# Altium PCB WallBaseBoard.PcbDoc
Units mil, origin at the board's own origin, x right, y up, seen from the top; angles counter-clockwise.
Board outline 1771.65 x 1771.65 mil, 2 copper layers (Top Layer, Bottom Layer); 40 components, 33 nets, 151 pads, 16 vias.
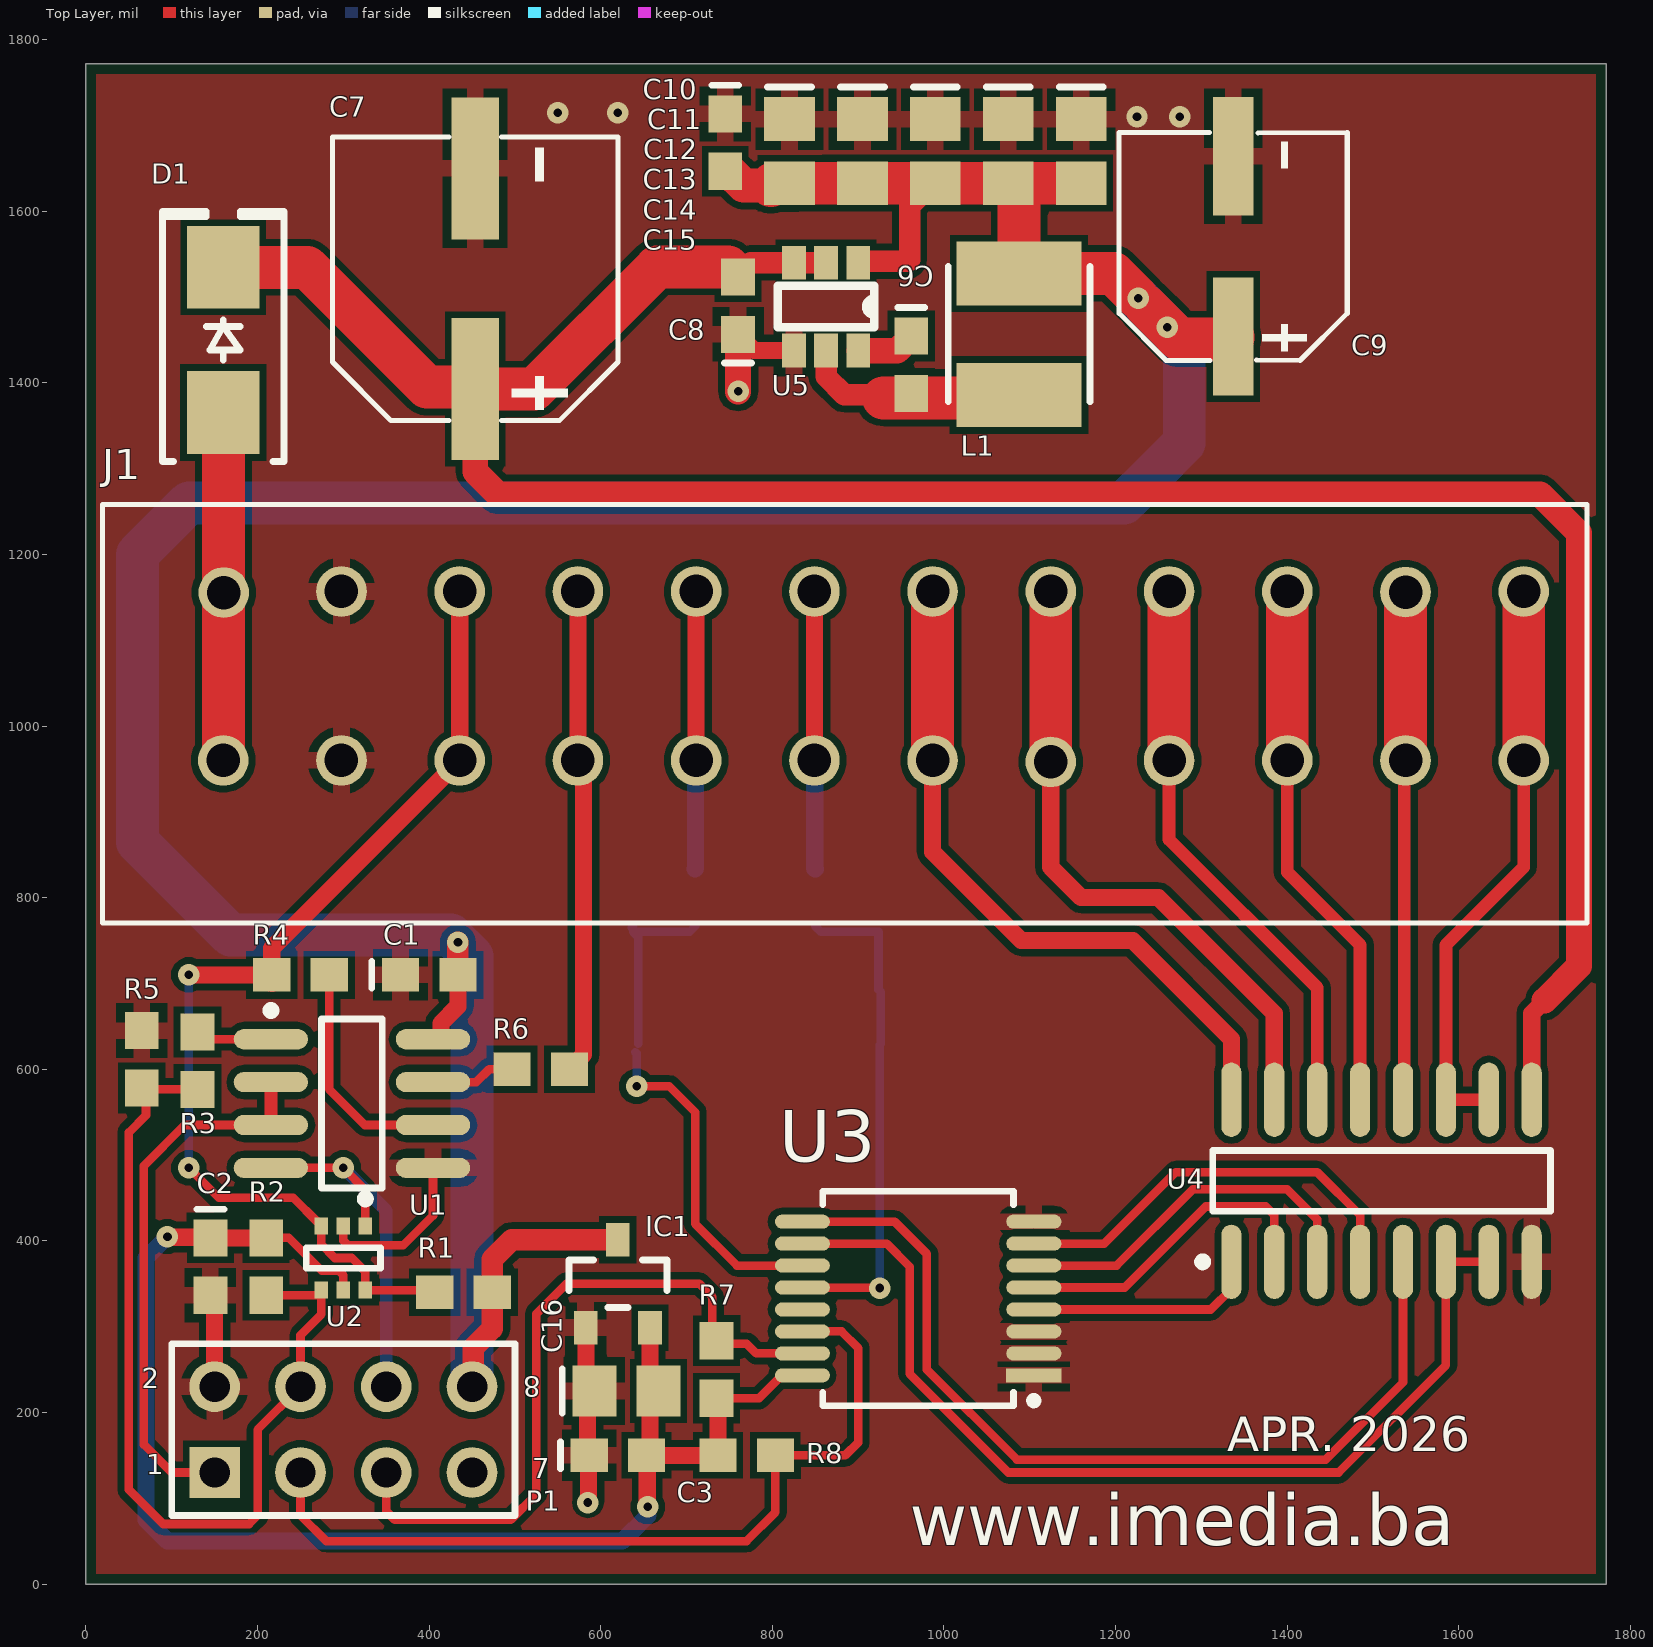
[diagram p0: Top Layer view]
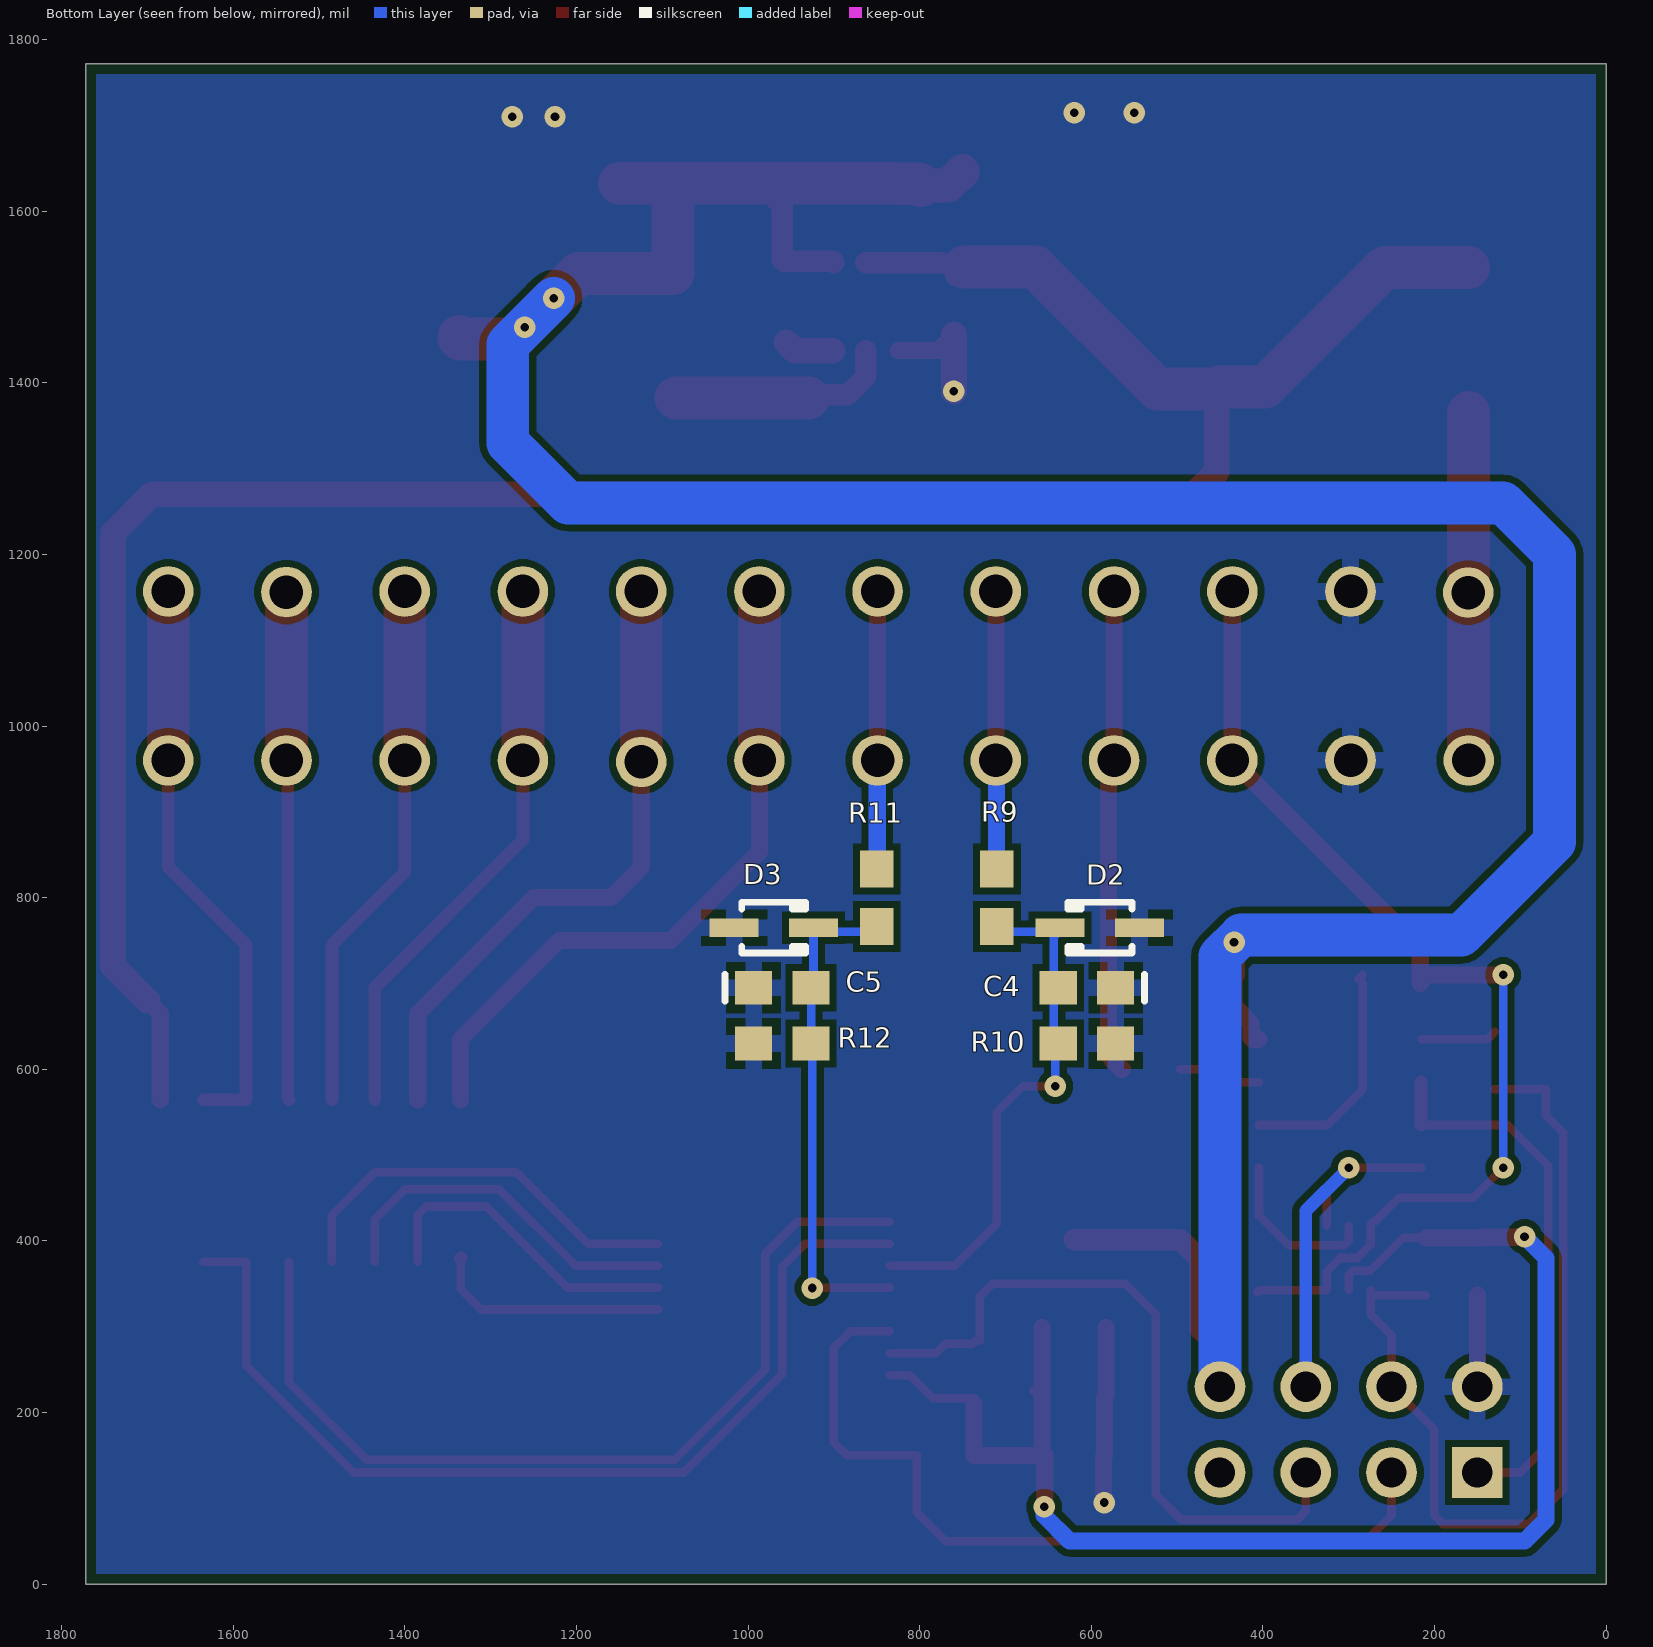
[diagram p1: Bottom Layer view, seen from below]

## Layer stack, top to bottom
Top Solder: solder mask 0.4, Solder Resist, Dk 3.5
Top Layer: signal copper 1.4
Dielectric 1: dielectric 12.6, FR-4, Dk 4.8
Bottom Layer: signal copper 1.4
Bottom Solder: solder mask 0.4, Solder Resist, Dk 3.5

## Board outline
0,0 0,1771.65 1771.65,1771.65 1771.65,0

## Design rules (kind name [scope] priority, off if disabled: settings)
BoardOutlineClearance [All] p1: gap=11.81 ignorepadtopadclearanceinfootprint=FALSE except(15.75: Arc-SplitBarrior Arc-SplitContinuation Track-SplitBarrior Track-SplitContinuation SMDPad-SplitBarrior SMDPad-SplitContinuation THPad-SplitBarrior THPad-SplitContinuation Via-SplitBarrior Via-SplitContinuation Fill-SplitBarrior Fill-SplitContinuation Poly-SplitBarrior Poly-SplitContinuation Region-SplitBarrior Region-SplitContinuation Text-SplitBarrior Text-SplitContinuation)
Clearance "Clearance Different Nets" [All] p1: gap=7.87 ignorepadtopadclearanceinfootprint=FALSE except(5: Arc-Arc Arc-Track Arc-SMDPad Track-Track Track-SMDPad SMDPad-SMDPad SMDPad-Via THPad-Via Via-Via; 10: Arc-Via Arc-Text Track-Via Track-Text SMDPad-Text THPad-Text Via-Text Fill-Text Poly-Text Region-Text Text-Text; 19.68: THPad-THPad Via-Hole)
Clearance "Clearance Same Nets" [All] p2: gap=7.87 ignorepadtopadclearanceinfootprint=FALSE except(5: Arc-Arc Arc-Track Arc-SMDPad Track-Track Track-SMDPad SMDPad-SMDPad SMDPad-Via THPad-Via; 10: Arc-Via Arc-Text Track-Via Track-Text SMDPad-Text THPad-Text Via-Via Via-Text Fill-Text Poly-Text Region-Text Text-Text)
Clearance "Clearance Bottom Layer" [OnLayer('Bottom Layer')] p3: gap=8 ignorepadtopadclearanceinfootprint=TRUE except(10: Arc-Text Track-Text SMDPad-Text THPad-Text Via-Text Fill-Text Poly-Text Region-Text Text-Text)
Clearance "Clearance Top Layer" [OnLayer('Top Layer')] p4: gap=8 ignorepadtopadclearanceinfootprint=TRUE except(10: Arc-Text Track-Text SMDPad-Text THPad-Text Via-Text Fill-Text Poly-Text Region-Text Text-Text)
HoleSize [All] p1: absolutevalues=TRUE maxlimit=248.03 minlimit=7.87 maxpercent=80.000 minpercent=20.000
MinimumAnnularRing [All] p1: minimumring=5.12
MinimumSolderMaskSliver [All] p1: minsoldermaskwidth=3.94
PolygonConnect PolygonConnect_1 [All] p1: thpad.connectstyle=Relief thpad.reliefconductorwidth=20 thpad.reliefentries=4 thpad.polygonreliefangle="90 Angle" thpad.airgapwidth=10 smdpad.connectstyle=Relief smdpad.reliefconductorwidth=20 smdpad.reliefentries=4 smdpad.polygonreliefangle="90 Angle" smdpad.airgapwidth=10 via.connectstyle=Direct via.reliefconductorwidth=20 via.reliefentries=4 via.polygonreliefangle="90 Angle" via.airgapwidth=10
RoutingCorners [All] p1: cornerstyle=Round minsetback=100 maxsetback=100
RoutingVias [All] p1: holewidth=19.68 width=39.37 viastyle="Through Hole" minholewidth=7.87 minwidth=13.78 maxholewidth=39.37 maxwidth=78.74
SilkToSilkClearance [All] p1: silktosilkclearance=3.94
SilkToSolderMaskClearance [IsPad] p1: minsilkscreentomaskgap=3.94 clearancetoexposedcopper=TRUE
SolderMaskExpansion [All] p1: expansion=5 istentingtop=FALSE
SupplyNets "Schematic Supply Nets_3" [InNet('VIN')] p1: voltage=0.000
SupplyNets "Schematic Supply Nets_2" [InNet('3V3')] p2: voltage=0.000
SupplyNets "Schematic Supply Nets_1" [InNet('GND')] p3: voltage=0.000
SupplyNets "Schematic Supply Nets" [InNet('5V')] p4: voltage=0.000
Width [All] p1: maxlimit=100 minlimit=5 preferedwidth=15
25 further rules are at their usual default settings.

## Components (designator, comment, footprint, x,y, rotation, side; value= is the part's Value field where it differs from the comment)
C1 "100nF" 0603 400,710 r0 top
C2 "100nF" 0603 145,370 r270 top
C3 "100nF" 0603 620,150 r0 top
C4 "100nF" 0603 605,695 r0 bottom
C5 "100nF" 0603 960,695 r180 bottom
C6 "100nF" 0603 961.99,1420.95 r270 top
C7 "220uF" SMD,D8xL10.2mm 460,1530 r90 top
C8 "100nF" 0603 760,1490 r90 top
C9 "ROQANG VT1C221M0607_1" "SMD,D6.3xL7.7mm Aluminum Electrolytic Capacitors" 1340,1570 r90 top value=220uF
C10 "100nF" 0603 745,1680 r270 top
C11 "4u7" 0805 820,1670 r270 top value=10uF
C12 "4u7" 0805 905,1670 r270 top value=10uF
C13 "4u7" 0805 990,1670 r270 top value=10uF
C14 "4u7" 0805 1075,1670 r270 top value=10uF
C15 "4u7" 0805 1160,1670 r270 top value=10uF
C16 "4u7" 0805 630,225 r0 top value=10uF
D1 "RS1DB-13-F" "DO214AA SMB" 160,1450 r90 top
D2 "3V3" SOD323 590,765 r0 bottom
D3 "3V3" SOD323 970,765 r180 bottom
IC1 "AP2138N-2.5TRG1" "DIODES SOT-23-3 N" 620,350 r90 top
J1 "1985292" CONN_1985292_PXC 160,960 r0 top
L1 "Inductor" XRNR4030-4.7uH/M 1090,1460 r270 top value=4,7uH
P1 "ESP32_S3" HDR2X4 150,130 r0 top
R1 "NF" ERA-0603 440,340 r0 top value=4K7
R2 "NF" ERA-0603 210,370 r90 top value=4K7
R3 "10K" ERA-0603 130,610 r90 top value=1K2
R4 "10K" ERA-0603 250,710 r180 top value=0R
R5 "10K" ERA-0603 65,611.54 r270 top value=2K2
R6 "10K" ERA-0603 530,600 r0 top value=0R
R7 "10K" ERA-0603 735,250 r270 top value=2K2
R8 "10K" ERA-0603 770,150 r180 top value=2K2
R9 "10K" ERA-0603 710,800 r270 bottom value=4K7
R10 "10K" ERA-0603 605,630 r0 bottom
R11 "10K" ERA-0603 850,800 r270 bottom value=4K7
R12 "10K" ERA-0603 960,630 r180 bottom
U1 "THVD1500DR" NSO8_N 310,560 r0 top
U2 "NC7WZ07P6X" FP-419AD-01-MFG 300,380 r270 top
U3 "PCA9554DBR" SSOP-16 1104.68,243.23 r180 top
U4 "ULN2003D" SO16_N 1510,470 r90 top
U5 "AP63205WU-7" TSOT-26 900,1540 r270 top

## Footprints (in the part's own frame and the unit in brackets; to place one, negate y for a bottom-side part, rotate by r counter-clockwise, add the part's x,y. Pads: shape width x height; smd on the part's side, far side on the other; paste and mask are expansions set on the pad)
0603 [mm]
  rect 1.1x1 smd: 1(-0.85,0) 2(0.85,0)
  silkscreen extent -1.7,-0.4 -1.7,0.4
0805 [mm]
  rect 1.3x1.5 smd: 1(-0.95,0) 2(0.95,0)
  silkscreen extent -1.9,-0.65 -1.9,0.65
CONN_1985292_PXC [mil]
  round 59 hole 39 paste-99999 mask+0: 1(0,0) 1(0.64,195.52) 2(137.8,0) 2(137.8,196.85) 3(275.59,0) 3(275.59,196.85) 4(413.39,0) 4(413.39,196.85) 5(551.18,196.85) 5(551.18,0) 6(688.98,0) 6(688.98,196.85) 7(826.77,196.85) 7(826.77,0) 8(964.43,-1.77) 8(964.57,196.85) 9(1102.36,196.85) 9(1102.36,0) 10(1240.16,0) 10(1240.16,196.85) 11(1377.95,0) 11(1377.96,196.09) 12(1515.75,0) 12(1515.75,196.85)
  silkscreen extent -141,-190 1589,298
"DIODES SOT-23-3 N" [mm] "SOT23, 3-Leads, Body 2.90x2.40mm, Pitch 0.95mm, IPC Medium Density"
  rect 1x0.7 smd: 1(-1.3,0.95) 2(-1.3,-0.95) 3(1.3,0)
  silkscreen extent -0.7,-1.45 0.7,1.45, body extent -1.5,-1.55 1.5,1.55, height 1.45
"DO214AA SMB" [mm] "Molded Diode, 2-Leads, Body 4.31x3.62mm, IPC Medium Density"
  rect 2.45x2.15 smd: 1(-2.15,0) 2(2.15,0)
  silkscreen extent -3.6,-1.8 3.8,1.8, body extent -2.6,-1.8 2.6,1.8, height 2.4
ERA-0603 [mm]
  rect 1.1x1 smd: 1(-0.85,0) 2(0.85,0)
FP-419AD-01-MFG [mm]
  rect 0.5x0.4 smd paste+0 mask+0: 1(-0.95,0.65) 2(-0.95,0) 3(-0.95,-0.65) 4(0.95,-0.65) 5(0.95,0) 6(0.95,0.65)
  silkscreen extent -1.87,-1.1 0.3,1.1, body extent -1.3,-1.2 1.3,1.2, height 0.25
HDR2X4 [mm] "Connector; Header; 4x2 Position"
  rect 1.5x1.5 hole 0.9: 1(0,0)
  round 1.5 hole 0.9: 2(0,2.54) 3(2.54,0) 4(2.54,2.54) 5(5.08,0) 6(5.08,2.54) 7(7.62,0) 8(7.62,2.54)
  silkscreen extent -1.27,-1.27 8.89,3.81
NSO8_N [mm] "SOIC, 8-Leads, Body 4.9x3.9mm, Pitch 1.27mm, IPC Medium Density"
  oval 2.2x0.6 smd: 1(-2.4,1.905) 2(-2.4,0.635) 3(-2.4,-0.635) 4(-2.4,-1.905) 5(2.4,-1.905) 6(2.4,-0.635) 7(2.4,0.635) 8(2.4,1.905)
  silkscreen extent -2.52,-2.5 0.9,2.88, body extent -2,-2.5 2,2.5, height 1.75
"SMD,D6.3xL7.7mm Aluminum Electrolytic Capacitors" [mm]
  rect 3.5x1.2 smd paste+0 mask+0.051: 1(-2.949,0.074) 2(2.391,0.074)
  silkscreen extent -3.66,-3.3 3.1,3.45, body extent -3.4,-3.15 2.9,3.15, height 7.7
SMD,D8xL10.2mm [mm]
  rect 4.2x1.4 smd paste+0 mask+0.051: 1(-3.488,0.162) 2(3.046,0.162)
  silkscreen extent -4.42,-4.06 3.98,4.39, body extent -4.25,-3.82 3.75,4.18, height 10.2
SO16_N [mm] "SOIC, 16-Leads, Body 9.9x3.9mm, Pitch 1.27mm, IPC Medium Density"
  oval 2.2x0.6 smd: 1(-2.4,4.445) 2(-2.4,3.175) 3(-2.4,1.905) 4(-2.4,0.635) 5(-2.4,-0.635) 6(-2.4,-1.905) 7(-2.4,-3.175) 8(-2.4,-4.445) 9(2.4,-4.445) 10(2.4,-3.175) 11(2.4,-1.905) 12(2.4,-0.635) 13(2.4,0.635) 14(2.4,1.905) 15(2.4,3.175) 16(2.4,4.445)
  silkscreen extent -2.52,-5 0.9,5.42, body extent -1.95,-4.95 1.95,4.95, height 1.75
SOD323 [mm] "SOD-323/SC-76; 2 Leads; Body 1.7 x 1.3 mm, (LxW)"
  rect 1.45x0.55 smd: 1(1.175,0) 2(-1.175,0)
  silkscreen extent -0.95,-0.75 0.95,0.75
SSOP-16 [mm] "SSOP, 16-Leads, Body 6.2x5.3mm, Pitch 0.65mm"
  rect 1.63x0.42 smd: 1(0,0)
  oval 1.63x0.42 smd: 2(0,-0.65) 3(0,-1.3) 4(0,-1.95) 5(0,-2.6) 6(0,-3.25) 7(0,-3.9) 8(0,-4.55) 9(6.85,-4.55) 10(6.85,-3.9) 11(6.85,-3.25) 12(6.85,-2.6) 13(6.85,-1.95) 14(6.85,-1.3) 15(6.85,-0.65) 16(6.85,0)
  silkscreen extent -0.1,-5.45 6.25,0.9, body extent -0.48,-5.38 7.32,0.83, height 1.9
TSOT-26 [mm]
  rect 1x0.7 smd: 1(0,0) 2(0,-0.95) 3(0,-1.9) 4(2.6,-1.9) 5(2.6,-0.95) 6(2.6,0)
  silkscreen extent 0.69,-2.38 1.91,0.48, body extent 0.53,-2.51 2.03,0.61, height 1
XRNR4030-4.7uH/M [mm]
  rect 1.9x3.7 smd paste+0 mask+0.051: 1(-1.717,-0.059) 2(1.883,-0.059)
  silkscreen extent -1.92,-2.16 2.08,2.04

## Part data
C1 C2 C3 C4 C5 C6 C8 C10: library part C0603, "Ceramic Chip Capacitor - Standard", PackageDocument=Mar-2001, Code_IPC="1608 [0603]", Code_JEITA=0603, ComponentLink1Description="Manufacturer Link", ComponentLink1URL=http://www.kemet.com/, ComponentLink2Description=Datasheet, ComponentLink2URL=http://www.kemet.com/kemet/web/homepage/kechome.nsf/vapubfilesname/F3102TA.pdf/$file/F3102TA.pdf, DatasheetDocument=Mar-2001, LatestRevisionDate=19-Mar-2004, LatestRevisionNote="Silkscreen size reduced.", Note="Footprint corresponds to dimensions for bulk cassette packaging. This case size has tightened tolerances.", PackageReference=0603, Published=17-Jul-2002, Publisher="Altium Limited"
C7: library part "ROQANG VT1V221M0810", "220uF 35V 195mA@120Hz ±20% SMD,D8xL10.2mm Aluminum Electrolytic Capacitors - SMD ROHS", ComponentLink1Description="Manufacturer Link", ComponentLink1URL=http://www.vishay.com/, ComponentLink2Description=Datasheet, ComponentLink2URL=http://www.vishay.com/docs/25014/eka.pdf, DatasheetDocument=20-Feb-2001, DrillSize="Nominal, Rounded To The Nearest 0.1mm", Note="Refer to Manufacturer's Data Sheets for other lead formations", PackageReference=CAPPR2-5X11, Published=19-Mar-2004, Publisher="Altium Limited"
C9: "220uF 16V 110mA@120Hz ±20% SMD,D6.3xL7.7mm Aluminum Electrolytic Capacitors - SMD ROHS", ComponentLink1Description="Manufacturer Link", ComponentLink1URL=http://www.vishay.com/, ComponentLink2Description=Datasheet, ComponentLink2URL=http://www.vishay.com/docs/25014/eka.pdf, DatasheetDocument=20-Feb-2001, DrillSize="Nominal, Rounded To The Nearest 0.1mm", Note="Refer to Manufacturer's Data Sheets for other lead formations", PackageReference=CAPPR2-5X11, Published=19-Mar-2004, Publisher="Altium Limited"
C11 C12 C13 C14 C15 C16: library part C0805, "Ceramic Chip Capacitor - Standard", PackageDocument=Mar-2001, Code_IPC=2012[0805], Code_JEITA=0805, ComponentLink1Description="Manufacturer Link", ComponentLink1URL=http://www.kemet.com/, ComponentLink2Description=Datasheet, ComponentLink2URL=http://www.kemet.com/kemet/web/homepage/kechome.nsf/vapubfilesname/F3102TA.pdf/$file/F3102TA.pdf, DatasheetDocument=Mar-2001, LatestRevisionDate=19-Mar-2004, LatestRevisionNote="Silkscreen size reduced.", Note="Footprint corresponds to dimensions for bulk cassette packaging. This case size has tightened tolerances.", PackageReference=0805, Published=17-Jul-2002, Publisher="Altium Limited"
D1: "DIODE STANDARD 200V 1A SMB", Capacitance @ Vr, F="15pF @ 4V, 1MHz", Current - Average Rectified (Io)=1A, Current - Reverse Leakage @ Vr="5 µA @ 200 V", Manufacturer="Diodes Incorporated", Operating Temperature - Junction="-65°C ~ 150°C", Package / Case="DO-214AA, SMB", Supplier Device Package=SMB, Supplier Part Number 1=RS1DB-FDICT-ND, Voltage - DC Reverse (Vr) (Max)="200 V", Voltage - Forward (Vf) (Max) @ If="1.3 V @ 1 A", ComponentLink1Description=Datasheet, ComponentLink1URL=https://www.diodes.com/assets/Datasheets/ds15002.pdf, ComponentLink2Description="DigiKey Link", ComponentLink2URL=https://www.digikey.com/en/products/detail/diodes-incorporated/RS1DB-13-F/814459, Diode Type=Standard, LastUpdated="3. 4. 2026. 20:33:12", Lifecycle Status=Active, Minimum Order=1, Mounting Type="Surface Mount", Packaging=TapeAndReel, Part Number=RS1DB-13-F, Part Status=Active, PartId=28, Price=0.06, Reverse Recovery Time (trr)="150 ns", Series=-, Speed="Fast Recovery =< 500ns, > 200mA (Io)", Supplier 1=DigiKey
D2 D3: library part 1PS76SB10, "Schottky Barrier Diode", ComponentLink1Description="Manufacturer Link", ComponentLink1URL=http://www.semiconductors.philips.com/, ComponentLink2Description=Datasheet, ComponentLink2URL=http://www.semiconductors.philips.com/acrobat/datasheets/1PS76SB10_2.pdf, DatasheetVersion=14-Oct-1996, LatestRevisionDate=19-Mar-2004, LatestRevisionNote="Silkscreen size reduced.", PackageDescription="SOD-323/SC-76; 2 Leads; Body 1.7 x 1.3 mm, (LxW)", PackageReference=SOD323, PackageVersion=May-1999, Published=17-Sep-2003, Publisher="Altium Limited"
IC1: "IC REG LINEAR 2.5V 250MA SOT23-3", Current - Output=250mA, Current - Quiescent (Iq)="1.5 µA", Manufacturer="Diodes Incorporated", Operating Temperature="-40°C ~ 85°C (TA)", Package / Case="TO-236-3, SC-59, SOT-23-3", Supplier Device Package=SOT-23-3, Supplier Part Number 1=AP2138N-2.5TRG1DICT-ND, Voltage - Input (Max)=6V, Voltage - Output (Min/Fixed)=2.5V, Voltage Dropout (Max)="1V @ 250mA", ComponentLink1Description=Datasheet, ComponentLink1URL=https://www.diodes.com/assets/Datasheets/AP2138-9.pdf, ComponentLink2Description="DigiKey Link", ComponentLink2URL=https://www.digikey.com/en/products/detail/diodes-incorporated/AP2138N-2-5TRG1/4470803, LastUpdated="3. 4. 2026. 21:07:40", Lifecycle Status=Active, Minimum Order=1, Mounting Type="Surface Mount", Number of Regulators=1, Output Configuration=Positive, Output Type=Fixed, Packaging=TapeAndReel, Part Number=AP2138N-2.5TRG1, Part Status=Active, Price=0.08, Protection Features="Over Current", Series=-, Supplier 1=DigiKey
J1: "PCB terminal block, nominal current: 8 A, nom. voltage: 400 V, pitch: 3.5 mm, number of positions: 12, connection method: Push-in spring connection, mounting: Wave soldering, conductor/PCB connection direction: 45 Â°, color: green. Offset soldering legs, two-rowed", Manufacturer_Name="Phoenix Contact", Copyright="Copyright (C) 2026 Ultra Librarian. All rights reserved.", Manufacturer_Part_Number=1985292, RefDes=RefDes, Type=Type
L1: "2A 4.7uH Magnetic Adhesive Inductor ±20% 2.9A SMD-2P,4x4mm Power Inductors ROHS"
P1: library part "Header 4X2", "Header, 4-Pin, Dual row", LatestRevisionDate=17-Jul-2002, LatestRevisionNote="Re-released for DXP Platform.", Publisher="Altium Limited"
R1 R2 R3 R4 R5 R6 R7 R8 R9 R10 R11 R12: library part ERAV, "Metal Film Thermosensitive Chip Resistor, 0.56 Ohm to 10k Ohm Range, 5% Tolerance, 0603 Size, 0.063 W", PackageDocument=Mar-2003, Code_IPC="1608 [0603]", ComponentLink1Description="Manufacturer Link", ComponentLink1URL=http://www.panasonic.com/industrial/components/resistive_products.htm, ComponentLink2Description=Datasheet, ComponentLink2URL=http://www.panasonic.com/industrial/components/pdf/AOF0000CE1.pdf, LatestRevisionDate=19-Mar-2004, LatestRevisionNote="Silkscreen size reduced.", Note="If flow soldering, adjust pad width of PCB Footprint to 0.7 - 0.8 times the width of the resistor.", PackageReference=ERA-0603, Published=17-Dec-2003, Publisher="Altium Limited"
U1: library part MAX485ESA, "Low-Power, Slew-Rate-Limited RS-485/RS-422 Transceiver", Code_IPC=SOIC127P600-8, Code_JEDEC=MS-012-AA, ComponentLink1Description="Manufacturer Link", ComponentLink1URL=http://www.maxim-ic.com/, ComponentLink2Description=Datasheet, ComponentLink2URL=http://pdfserv.maxim-ic.com/en/ds/MAX1487-MAX491.pdf, DatasheetVersion=Feb-1996, LatestRevisionDate=13-Apr-2006, LatestRevisionNote="IPC-7351 Footprint Added.", PackageDescription="8-Pin Small Outline Integrated Circuit 1.27 mm Pitch", PackageReference=NSO8, Published=16-Jan-2001, Publisher="Altium Limited"
U2: library part CMP-2000-06822-2, "IC BUF NON-INVERT 5.5V SC70-6", Case/Package=SC, High Level Output Current=32mA, Max Operating Temperature=85°C, Max Power Dissipation=180mW, Max Supply Current=24mA, Max Supply Voltage=5.5V, Min Operating Temperature=-40°C, Min Supply Voltage=1.65V, Package Quantity=1, Quiescent Current=1uA, Height=1mm, Lead Free="Lead Free", Length=2mm, Logic Function=Buffer, Low Level Output Current=32mA, Mount="Surface Mount", Number of Bits=2, Number of Bits per Element=1, Number of Channels=2, Number of Circuits=2, Number of Elements=2, Number of Input Lines=2, Number of Inputs=2, Number of Output Lines=2, Number of Outputs=2, Number of Pins=6, Packaging="Tape and Reel", Polarity=Non-Inverting, Propagation Delay=12.6ns, Radiation Hardening=No, REACH SVHC="No SVHC", Termination=SMD/SMT, Turn-On Delay Time=11.5ns, Weight=0.028g, Width=1.25mm
U3: library part CMP-0314-00200-2, "Remote 8-Bit I2C and SMBus I/O Expander with Interrupt Output and Configuration Registers, 8 Outputs, 2.3 to 5.5 V, -40 to 85 degC, 16-pin SSOP (DB), Green (RoHS & no Sb/Br)", 5V Tolerant I/O=Yes, Manufacturer="Texas Instruments", Max Frequency(kHz)=400, # of I/Os=8, Code_JEDEC=MO-150, ComponentLink1Description=Datasheet, ComponentLink1URL=http://www.ti.com/general/docs/lit/getliterature.tsp?genericPartNumber=PCA9554&fileType=pdf, ComponentLink2Description="Package Specification", ComponentLink2URL=http://www.ti.com/litv/pdf/msso002e, Configuration Registers=Yes, DatasheetVersion=SCPS128B, Eco-Plan="Green (RoHS & no Sb/Br)", fSCLK(Max)(MHz)=400, I2C Address="0100 xxx", Interrupt Output=Yes, Mounting Technology="Surface Mount", No. of Outputs=8, PackageDescription="16-Pin Plastic Small Outline Package, 6.2 x 5.3 mm Body, 0.65 mm Pitch", PackageReference=DB0016A, PackageVersion="revE, Dec-2001", PartNumber=PCA9554DBR, Push-Pull I/O Type=Yes, SubFamily="I2C IO Expander", Technology Family=PCA, Vcc range(V)="2.3 to 5.5", VCC(Max)(V)=5.5, VCC(Min)(V)=2.3
U4: "Seven Darlington Array", Code_IPC=SOIC127P600-16, ComponentLink1Description="Manufacturer Link", ComponentLink1URL=http://www.st.com/, ComponentLink2Description=Datasheet, ComponentLink2URL=http://www.st.com/stonline/products/literature/ds/5279/uln2001.pdf, DatasheetVersion=Sep-1998, LatestRevisionDate=13-Apr-2006, LatestRevisionNote="IPC-7351 Footprint Added.", PackageDescription="16-Pin Small Outline Integrated Circuit 1.27 mm Pitch", PackageReference=SO16, PackageVersion=May-1998, Published=8-Jun-2000, Publisher="Altium Limited"
U5: library part AP63200, "2A synchronous  buck converter"

## Via types
v1: diameter 25, hole 10, Top Layer to Bottom Layer, 16 vias

## Nets (pads, with @x,y where several pads share a name; then routed paths per layer and width w, separated by ;. In a path a pad name is that pad's centre, name@x,y a point inside that pad or via, vN(x,y) a via of type N, cw(c..) or ccw(c..) an arc to the next point about the centre after c; other vN are vias at no path point)
3V3: C2.1 C3.2 C16.2 IC1.2 R2.2 R7.2 R8.2 U2.5 U3.16 | length 1668.6
  Top Layer w10: R2.2 236.54,403.46 275,365 295,365 300,360 U2.5 ; C3.2 C3.2@657.4,153.94 ; R7.2@741.54,210 R7.2 784.49,216.54 811.18,243.23 U3.16
  Top Layer w20: v1(95,405) 95.77,404.23 144.23,404.23 C2.1 ; C2.1@150,403.46 R2.2 ; v1(655,90) 654.23,90.77 654.23,149.23 C3.2 R8.2 R7.2@736.54,210 ; C3.2@657.4,153.94 657.4,220 IC1.2
  Bottom Layer w20: v1(95,405) 70,380 70,75 95,50 625,50 655,80 v1(655,90)
5V: C1.2 C9.1 C10.2 C11.2 C12.2 C13.2 C14.2 C15.2 IC1.3 L1.1 P1.8 R1.2 U1.8 U5.1 | length 4129.8
  Top Layer w20: U1.8 411.97,635 413.64,636.67 413.64,653.43 433.46,673.25 C1.2@433.46,700
  Top Layer w25: C1.2 433.58,710.12 v1(433.58,748.12) ; P1.8 451.24,231.24 451.24,275.53 473.46,297.75 R1.2 473.46,378.46 496.18,401.18 IC1.3 ; U5.1 900,1540.45 901.28,1541.73 958.27,1541.73 960,1543.46 960,1606.54 986.06,1632.6 C13.2
  Top Layer w40: C10.2@750,1646.54 750,1645.2 750.31,1644.88 751.65,1644.88 766.54,1630 C11.2@798.19,1630
  Top Layer w50: C11.2@798.19,1630 800.19,1632.01 829.41,1632.01 830,1632.6 C12.2 C13.2@986.06,1632.6 ; C13.2 C14.2@1073.94,1632.6 ; C15.2@1150,1632.6 C14.2 C14.2@1073.94,1632.6 ; v1(1226.42,1498.59) 1197.41,1527.6 L1.1 1087.68,1618.86 C14.2@1073.94,1632.6 ; v1@1235,1490 v1(1260,1465) 1273.92,1451.08 1335.72,1451.08 1337.1,1452.46 C9.1
  Bottom Layer w50: P1.8@450,232.45 450,731.7 425.46,756.23 168.77,756.23 60,865 60,1200 120,1260 1210,1260 1280,1330 1280,1444.98 1235,1489.98 v1(1226.42,1498.59)
DIN1: J1.5 R9.1 | length 323.9
  Top Layer w20: J1.5@711.18,960 J1.5@711.18,1156.85
  Bottom Layer w20: R9.1 710.59,834.06 710.59,959.41 J1.5@711.18,960
DIN2: J1.6 R11.1 | length 323.8
  Top Layer w20: J1.6@848.98,960 J1.6@848.98,1156.85
  Bottom Layer w20: J1.6@848.98,960 849.49,959.49 849.49,833.98 R11.1
DOUT1: J1.7 U4.16 | length 812.8
  Top Layer w20: J1.7@986.77,960 986.77,853.23 1090,750 1220,750 1335,635 U4.16
  Top Layer w50: J1.7@986.77,960 J1.7@986.77,1156.85
DOUT2: J1.8 U4.15 | length 753.1
  Top Layer w15: J1.8@1124.43,958.23 J1.8@1124.5,958.3 ; J1.8@1124.5,1156.78 J1.8@1124.57,1156.85
  Top Layer w20: J1.8@1124.43,958.23 1124.43,835.57 1160,800 1250,800 1385,665 U4.15
  Top Layer w50: J1.8@1124.5,958.3 J1.8@1124.5,1156.78
DOUT3: J1.9 U4.14 | length 663.9
  Top Layer w15: J1.9@1262.36,960 1262.36,867.64 1435,695 U4.14
  Top Layer w50: J1.9@1262.36,960 J1.9@1262.36,1156.85
DOUT4: J1.10 U4.13 | length 627.5
  Top Layer w15: J1.10@1400.16,960 1400.16,829.84 1485,745 U4.13
  Top Layer w50: J1.10@1400.16,960 J1.10@1400.16,1156.85
DOUT5: J1.11 U4.12 | length 592.8
  Top Layer w15: U4.12 1536.48,565.96 1536.48,958.52 J1.11@1537.95,960
  Top Layer w50: J1.11@1537.96,960 J1.11@1537.96,1156.09
DOUT6: J1.12 U4.10 U4.11 | length 680
  Top Layer w15: U4.10 U4.11 1585,745 1675.75,835.75 J1.12@1675.75,960
  Top Layer w50: J1.12@1675.75,960 J1.12@1675.75,1156.85
GND: C1.1 C2.2 C3.1 C4.1 C5.1 C7.2 C8.1 C9.2 C10.1 C11.1 C12.1 C13.1 C14.1 C15.1 C16.1 D2.2 D3.2 IC1.1 J1.2 P1.2 R5.1 R10.1 R12.1 U1.5 U2.2 U3.1 U3.2 U3.3 U3.8 U4.8 U5.4 | length 628.8
  Top Layer w10: U2.2 300,400 305,395 370,395 404.49,429.49 U1.5
  Top Layer w20: P1.2 C2.2@150,336.54 ; IC1.1 582.6,220 584.57,218.03 584.57,150 585.77,148.8 585.77,95.77 v1(585,95) ; C8.1@771.65,1444.88 778.9,1437.64 U5.4
  Top Layer w30: v1(760,1390) C8.1
  other v1: 1225,1710 1275,1710 550,1715 620,1715
I2C_SCL: P1.3 R8.1 U3.14 | length 982.1
  Top Layer w10: P1.3 250,80 280,50 770,50 803.46,83.46 R8.1 885,150 900,165 900,275 880.59,294.41 U3.14
I2C_SDA: P1.5 R7.1 U3.15 | length 829.9
  Top Layer w10: P1.5 350,85 360,75 495,75 525,105 525,315 560,350 715,350 730,335 R7.1@730,283.46 ; R7.1 738.46,280 770,280 781.18,268.82 U3.15
NetC4_2: C4.2 D2.1 R9.2 R10.2 U3.11 | length 605.3
  Top Layer w10: v1(641.81,580) 680,580 710,550 710,420 758.82,371.18 U3.11
  Bottom Layer w10: D2.1 D2.1@637.64,765 ; R10.2@640.28,620 641.81,618.46 v1(641.81,580) ; R10.2@643.46,630 643.46,754.17 637.64,760 703.46,760 R9.2
NetC5_2: C5.2 D3.1 R11.2 R12.2 U3.12 | length 583.5
  Top Layer w10: U3.12 835.3,345.3 924.7,345.3 v1(925,345)
  Bottom Layer w10: R11.2 856.54,760 923.74,760 923.74,692.8 926.54,690 R12.2 925,628.46 v1(925,345)
NetC6_1: C6.1 U5.6 | length 59.6
  Top Layer w20: U5.6@900,1436.22 U5.6
  Top Layer w30: U5.6@901.22,1437.45 945.5,1437.45 C6.1@955.31,1447.26
NetC6_2: C6.2 L1.2 U5.5 | length 258.8
  Top Layer w25: U5.5 862.6,1434.69 862.6,1431.73 862.6,1407.4 883.71,1386.29 913.94,1386.29 923.69,1376.54
  Top Layer w50: 929.56,1382.41 L1.2@1084.22,1382.41
NetD1_1: D1.1 J1.1 | length 405.9
  Top Layer w50: J1.1@160,960 160.32,960.32 160.32,1155.2 160.64,1155.52 160.32,1155.84 160.32,1365.03 D1.1
NetR3_2: R3.2 U1.1 | length 89
  Top Layer w10: R3.2 138.46,635 U1.1
NetR4_1: R4.1 U1.6 | length 268.8
  Top Layer w10: R4.1@283.46,700 283.46,695 283.46,576.54 325,535 U1.6 ; R4.1 R4.1@288.46,705
NetR6_1: R6.1 U1.7 | length 98.3
  Top Layer w10: U1.7 455,585 470,600 R6.1
NetU3_4: U3.4 U4.1 | length 272.7
  Top Layer w10: U3.4 1310.98,320 1335,344.02 U4.1
  Top Layer w15: U4.1@1334.35,380 U4.1@1335,379.35
NetU3_5: U3.5 U4.2 | length 378.1
  Top Layer w10: U3.5 1210.59,345.59 1305,440 1375,440 1385,430 U4.2
NetU3_6: U3.6 U4.3 | length 431.1
  Top Layer w10: U3.6 1201.18,371.18 1290,460 1400,460 1435,425 U4.3
NetU3_7: U3.7 U4.4 | length 490
  Top Layer w10: U3.7 1186.77,396.77 1270,480 1435,480 1485,430 U4.4
NetU3_9: U3.9 U4.5 | length 1071.8
  Top Layer w10: U3.9 942.64,422.36 980,385 980,250 1085,145 1445,145 1535,235 U4.5
NetU3_10: U3.10 U4.6 U4.7 | length 1156
  Top Layer w10: U3.10 933.23,396.77 960,370 960,245 1075,130 1460,130 1585,255 U4.6 U4.7
RS485_A/OW: J1.3 R1.1 R4.2 U2.3 U2.6 | length 1232.4
  Top Layer w10: v1(120,485) 155,450 241.81,450 269.57,422.24 271.54,422.24 274.41,419.37 U2.3 274.41,395.59 290,380 310,380 325.59,364.41 U2.6 403.94,342.6 R1.1
  Top Layer w20: v1(120,710) R4.2 ; R4.2@216.54,700 216.54,740.94 435.59,960 J1.3@435.59,1156.85
  Bottom Layer w10: v1(120,485) v1@120,700
RS485_B: J1.4 R6.2 | length 567.6
  Top Layer w20: R6.2 565.43,600 575.12,609.69 575.12,612.13 580,617.01 580,953.39 573.39,960 J1.4@573.39,1156.85
RS485_DE: P1.1 U1.2 U1.3 | length 638.6
  Top Layer w10: P1.1 100,130 67.5,162.5 67.5,487.5 115,535 U1.3
  Top Layer w15: U1.3 U1.2
RS485_RX: P1.4 R2.1 R3.1 R5.2 U2.4 | length 1065.1
  Top Layer w10: R3.1 70,576.54 70,546.38 50,526.38 50,110 90,70 190,70 200,80 200,180 P1.4 250,290 274.41,314.41 274.41,336.54 U2.4@274.41,340.63 ; R2.1 270.31,336.54 U2.4@274.41,340.63 ; U2.4 U2.4@274.41,340.63
RS485_TX: P1.6 U1.4 U2.1 | length 438.4
  Top Layer w10: U1.4 v1(300,485) 325.59,459.41 U2.1
  Bottom Layer w15: v1(300,485) 350,435 P1.6
VIN: C7.1 C8.2 D1.2 U4.9 U5.2 U5.3 | length 2906.1
  Top Layer w20: C8.2@748.46,1535 C8.2 ; U4.9 1685,665 1700,680
  Top Layer w25: C8.2@774.57,1540 U5.3 U5.2
  Top Layer w30: C7.1 453.61,1296.39 480,1270 1695,1270 1740,1225 1740,720 1700,680
  Top Layer w50: D1.2 257.91,1534.65 397.55,1395 451.29,1395 C7.1 522.68,1392.68 665,1535 C8.2@748.46,1535
pads on no net: P1.7 U3.13

## Polygon pours and split planes (outlines as drawn)
GND on Bottom Layer "GND_L02_P001" (solid, pour order 1): 0,1770 1770,1770 1770,0 1765,5 0,5
GND on Top Layer "GND_L01_P002" (solid, pour order 2): 0,1770 1770,1770 1770,5 0,5

## Silkscreen, mask and mechanical layers (free items; w line width, h text height)
Top Overlay:
  text "APR. 2026" at 1330,155 h40
  text "www.imedia.ba" at 960,45 h60
Mechanical 1:
  the board outline again, w10

## Text inside footprints (layer, text, board x,y; h text height)
P1: Top Overlay "8" at 530,250 h40 r180; Top Overlay "7" at 520,115 h40; Top Overlay "1" at 70,120 h40; Top Overlay "2" at 65,220 h40